# EAGLE board panel (EAGLE 6.3)
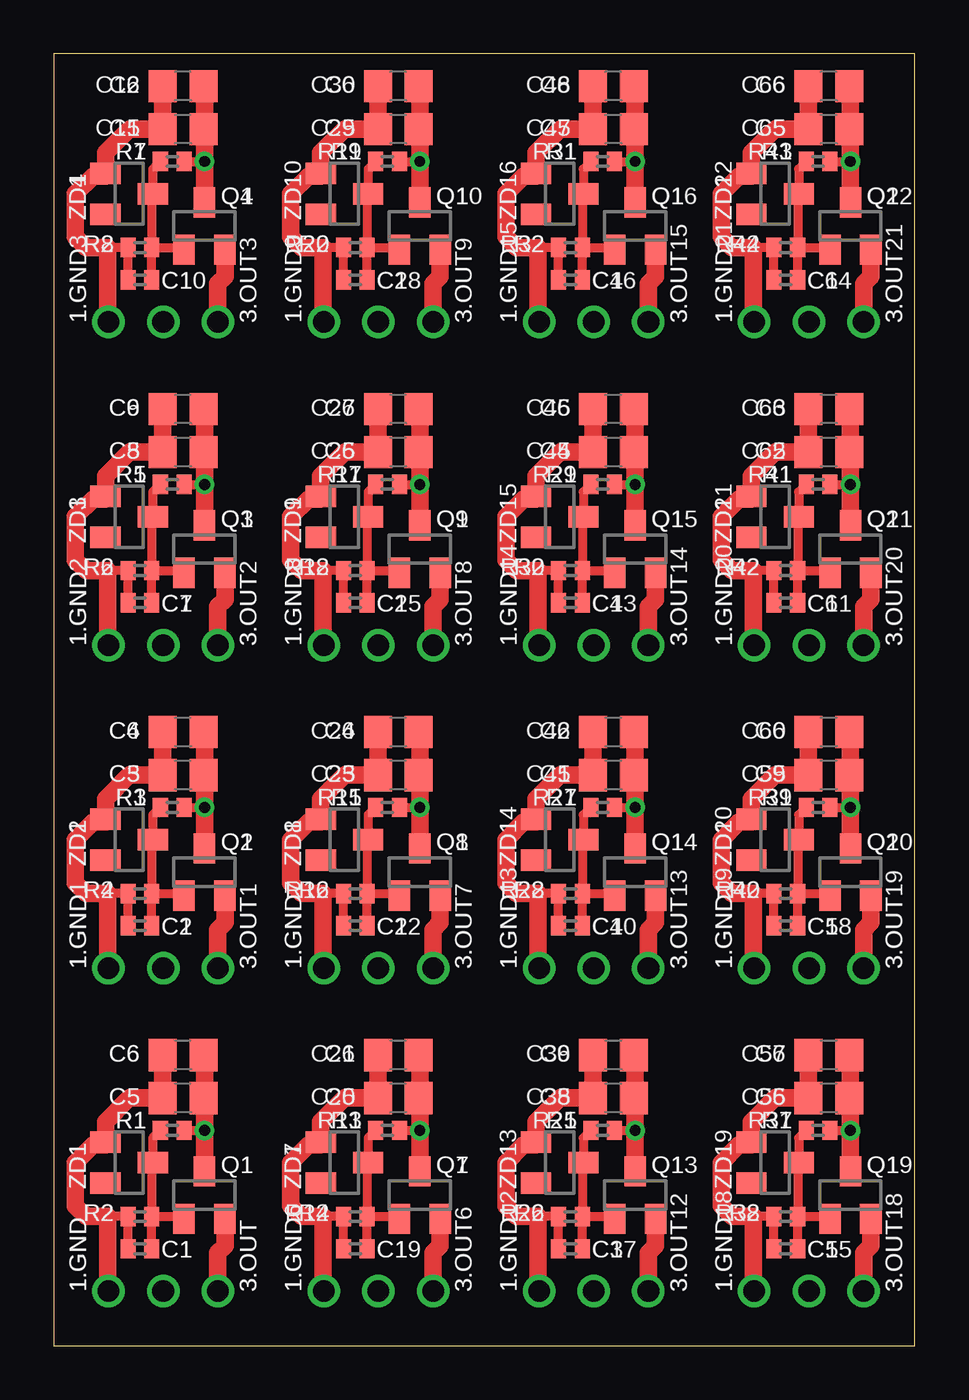
[diagram p0: board, top side]
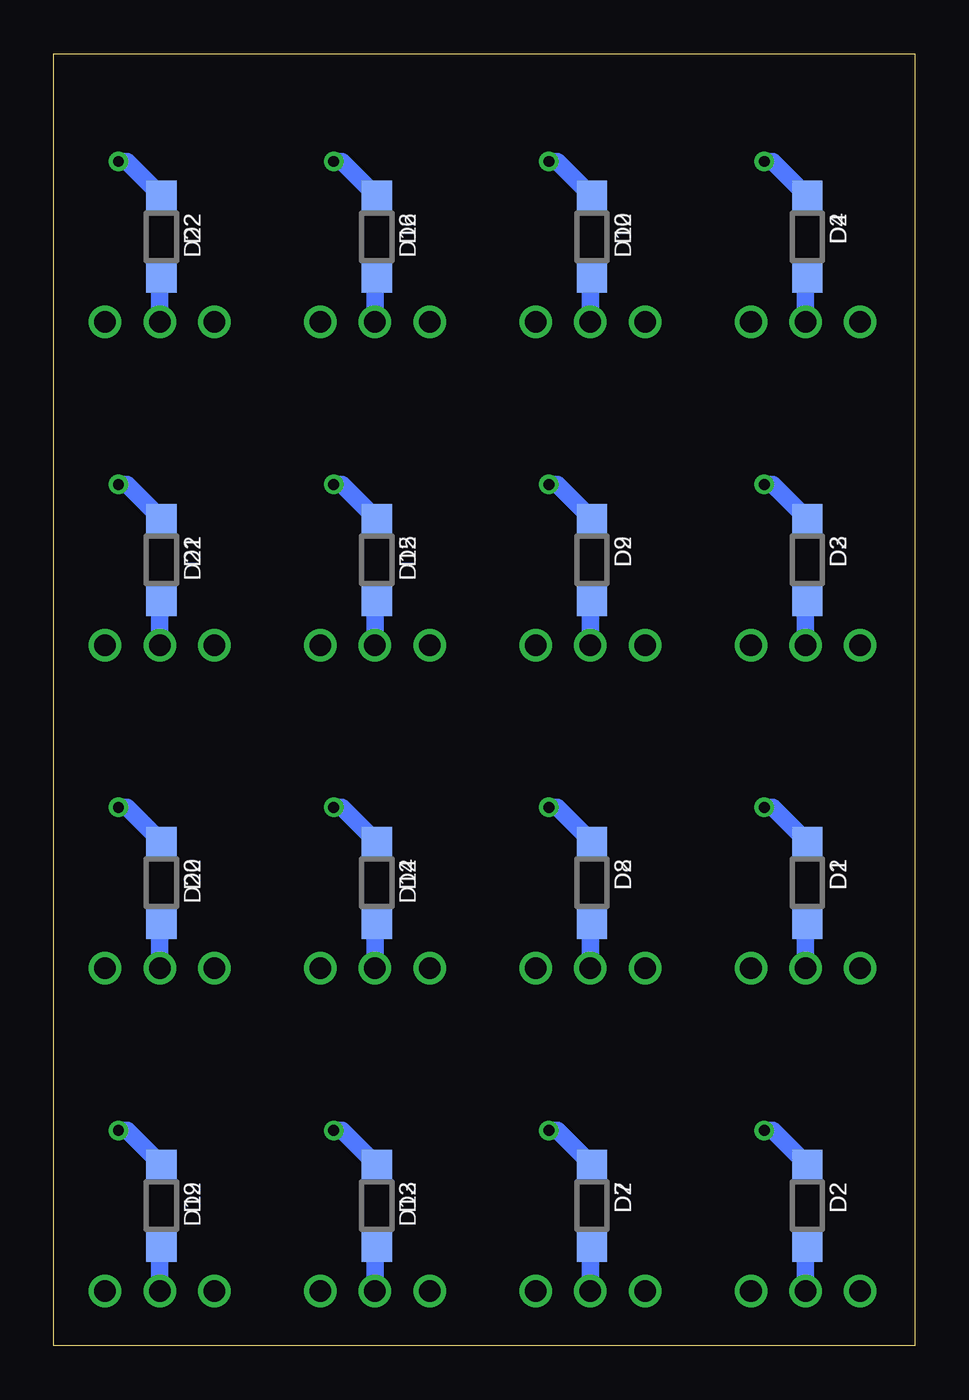
[diagram p1: board, bottom side, seen from below]

Size 40 x 60 mm. Coordinates in mm from the lower left corner, seen from the top.
Outline: 0,0 40,0 40,60 0,60 0,0
Copper layers (1*16): Top 0.035mm / dielectric 1.5mm / Bottom 0.035mm
Design rules "default": minimum track width 10mil, minimum drill 24mil, track to track 8mil, track to pad 8mil, pad to pad 8mil, via to via 8mil, smd to smd 8mil, copper to edge 40mil, drill to drill 8mil, minimum pad ring 10mil, minimum via ring 8mil, stop-mask expansion 4mil, vias tented up to drill 0mil, thermal gap 10mil

## Footprints (pad centres in the part's own frame; a part is rotated, then mirrored left to right if it is on the bottom)
PINS_1_TESTPOINT_KE5000_NOTEXT = drill 1: 1 0,0
C0402 = smd 0.7 x 0.9: 1 -0.55,0; 2 0.55,0
C0805 = smd 1.3 x 1.5: 1 -0.95,0; 2 0.95,0
SOD123 = smd 1.4 x 1.4: A 1.9,0; C -1.9,0
SOT23 = smd 1 x 1.4: 1 -0.95,-1.1; 2 0.95,-1.1; 3 0,1.1
R0402 = smd 0.7 x 0.9: 1 -0.55,0; 2 0.55,0

## Placement (x,y rotation side)
1.GND  TESTPOINTKE5000-SMTEXT  [PINS_1_TESTPOINT_KE5000_NOTEXT]  2.54,2.54 90 top
1.GND1  TESTPOINTKE5000-SMTEXT  [PINS_1_TESTPOINT_KE5000_NOTEXT]  2.54,17.54 90 top
1.GND2  TESTPOINTKE5000-SMTEXT  [PINS_1_TESTPOINT_KE5000_NOTEXT]  2.54,32.54 90 top
1.GND3  TESTPOINTKE5000-SMTEXT  [PINS_1_TESTPOINT_KE5000_NOTEXT]  2.54,47.54 90 top
1.GND6  TESTPOINTKE5000-SMTEXT  [PINS_1_TESTPOINT_KE5000_NOTEXT]  12.54,2.54 90 top
1.GND7  TESTPOINTKE5000-SMTEXT  [PINS_1_TESTPOINT_KE5000_NOTEXT]  12.54,17.54 90 top
1.GND8  TESTPOINTKE5000-SMTEXT  [PINS_1_TESTPOINT_KE5000_NOTEXT]  12.54,32.54 90 top
1.GND9  TESTPOINTKE5000-SMTEXT  [PINS_1_TESTPOINT_KE5000_NOTEXT]  12.54,47.54 90 top
1.GND12  TESTPOINTKE5000-SMTEXT  [PINS_1_TESTPOINT_KE5000_NOTEXT]  22.54,2.54 90 top
1.GND13  TESTPOINTKE5000-SMTEXT  [PINS_1_TESTPOINT_KE5000_NOTEXT]  22.54,17.54 90 top
1.GND14  TESTPOINTKE5000-SMTEXT  [PINS_1_TESTPOINT_KE5000_NOTEXT]  22.54,32.54 90 top
1.GND15  TESTPOINTKE5000-SMTEXT  [PINS_1_TESTPOINT_KE5000_NOTEXT]  22.54,47.54 90 top
1.GND18  TESTPOINTKE5000-SMTEXT  [PINS_1_TESTPOINT_KE5000_NOTEXT]  32.54,2.54 90 top
1.GND19  TESTPOINTKE5000-SMTEXT  [PINS_1_TESTPOINT_KE5000_NOTEXT]  32.54,17.54 90 top
1.GND20  TESTPOINTKE5000-SMTEXT  [PINS_1_TESTPOINT_KE5000_NOTEXT]  32.54,32.54 90 top
1.GND21  TESTPOINTKE5000-SMTEXT  [PINS_1_TESTPOINT_KE5000_NOTEXT]  32.54,47.54 90 top
2.PWR  TESTPOINTKE5000-SMTEXT  [PINS_1_TESTPOINT_KE5000_NOTEXT]  5.08,2.54 180 top
2.PWR1  TESTPOINTKE5000-SMTEXT  [PINS_1_TESTPOINT_KE5000_NOTEXT]  5.08,17.54 180 top
2.PWR2  TESTPOINTKE5000-SMTEXT  [PINS_1_TESTPOINT_KE5000_NOTEXT]  5.08,32.54 180 top
2.PWR3  TESTPOINTKE5000-SMTEXT  [PINS_1_TESTPOINT_KE5000_NOTEXT]  5.08,47.54 180 top
2.PWR6  TESTPOINTKE5000-SMTEXT  [PINS_1_TESTPOINT_KE5000_NOTEXT]  15.08,2.54 180 top
2.PWR7  TESTPOINTKE5000-SMTEXT  [PINS_1_TESTPOINT_KE5000_NOTEXT]  15.08,17.54 180 top
2.PWR8  TESTPOINTKE5000-SMTEXT  [PINS_1_TESTPOINT_KE5000_NOTEXT]  15.08,32.54 180 top
2.PWR9  TESTPOINTKE5000-SMTEXT  [PINS_1_TESTPOINT_KE5000_NOTEXT]  15.08,47.54 180 top
2.PWR12  TESTPOINTKE5000-SMTEXT  [PINS_1_TESTPOINT_KE5000_NOTEXT]  25.08,2.54 180 top
2.PWR13  TESTPOINTKE5000-SMTEXT  [PINS_1_TESTPOINT_KE5000_NOTEXT]  25.08,17.54 180 top
2.PWR14  TESTPOINTKE5000-SMTEXT  [PINS_1_TESTPOINT_KE5000_NOTEXT]  25.08,32.54 180 top
2.PWR15  TESTPOINTKE5000-SMTEXT  [PINS_1_TESTPOINT_KE5000_NOTEXT]  25.08,47.54 180 top
2.PWR18  TESTPOINTKE5000-SMTEXT  [PINS_1_TESTPOINT_KE5000_NOTEXT]  35.08,2.54 180 top
2.PWR19  TESTPOINTKE5000-SMTEXT  [PINS_1_TESTPOINT_KE5000_NOTEXT]  35.08,17.54 180 top
2.PWR20  TESTPOINTKE5000-SMTEXT  [PINS_1_TESTPOINT_KE5000_NOTEXT]  35.08,32.54 180 top
2.PWR21  TESTPOINTKE5000-SMTEXT  [PINS_1_TESTPOINT_KE5000_NOTEXT]  35.08,47.54 180 top
3.OUT  TESTPOINTKE5000-SMTEXT  [PINS_1_TESTPOINT_KE5000_NOTEXT]  7.62,2.54 270 top
3.OUT1  TESTPOINTKE5000-SMTEXT  [PINS_1_TESTPOINT_KE5000_NOTEXT]  7.62,17.54 270 top
3.OUT2  TESTPOINTKE5000-SMTEXT  [PINS_1_TESTPOINT_KE5000_NOTEXT]  7.62,32.54 270 top
3.OUT3  TESTPOINTKE5000-SMTEXT  [PINS_1_TESTPOINT_KE5000_NOTEXT]  7.62,47.54 270 top
3.OUT6  TESTPOINTKE5000-SMTEXT  [PINS_1_TESTPOINT_KE5000_NOTEXT]  17.62,2.54 270 top
3.OUT7  TESTPOINTKE5000-SMTEXT  [PINS_1_TESTPOINT_KE5000_NOTEXT]  17.62,17.54 270 top
3.OUT8  TESTPOINTKE5000-SMTEXT  [PINS_1_TESTPOINT_KE5000_NOTEXT]  17.62,32.54 270 top
3.OUT9  TESTPOINTKE5000-SMTEXT  [PINS_1_TESTPOINT_KE5000_NOTEXT]  17.62,47.54 270 top
3.OUT12  TESTPOINTKE5000-SMTEXT  [PINS_1_TESTPOINT_KE5000_NOTEXT]  27.62,2.54 270 top
3.OUT13  TESTPOINTKE5000-SMTEXT  [PINS_1_TESTPOINT_KE5000_NOTEXT]  27.62,17.54 270 top
3.OUT14  TESTPOINTKE5000-SMTEXT  [PINS_1_TESTPOINT_KE5000_NOTEXT]  27.62,32.54 270 top
3.OUT15  TESTPOINTKE5000-SMTEXT  [PINS_1_TESTPOINT_KE5000_NOTEXT]  27.62,47.54 270 top
3.OUT18  TESTPOINTKE5000-SMTEXT  [PINS_1_TESTPOINT_KE5000_NOTEXT]  37.62,2.54 270 top
3.OUT19  TESTPOINTKE5000-SMTEXT  [PINS_1_TESTPOINT_KE5000_NOTEXT]  37.62,17.54 270 top
3.OUT20  TESTPOINTKE5000-SMTEXT  [PINS_1_TESTPOINT_KE5000_NOTEXT]  37.62,32.54 270 top
3.OUT21  TESTPOINTKE5000-SMTEXT  [PINS_1_TESTPOINT_KE5000_NOTEXT]  37.62,47.54 270 top
C1  1u  [C0402]  4,4.5 180 top
C2  1u  [C0402]  4,19.5 180 top
C3  4u7 50V  [C0805]  6,26.5 180 top
C4  4u7 50V  [C0805]  6,28.5 180 top
C5  4u7 50V  [C0805]  6,11.5 180 top
C6  4u7 50V  [C0805]  6,13.5 180 top
C7  1u  [C0402]  4,34.5 180 top
C8  4u7 50V  [C0805]  6,41.5 180 top
C9  4u7 50V  [C0805]  6,43.5 180 top
C10  1u  [C0402]  4,49.5 180 top
C11  4u7 50V  [C0805]  6,56.5 180 top
C12  4u7 50V  [C0805]  6,58.5 180 top
C19  1u  [C0402]  14,4.5 180 top
C20  4u7 50V  [C0805]  16,11.5 180 top
C21  4u7 50V  [C0805]  16,13.5 180 top
C22  1u  [C0402]  14,19.5 180 top
C23  4u7 50V  [C0805]  16,26.5 180 top
C24  4u7 50V  [C0805]  16,28.5 180 top
C25  1u  [C0402]  14,34.5 180 top
C26  4u7 50V  [C0805]  16,41.5 180 top
C27  4u7 50V  [C0805]  16,43.5 180 top
C28  1u  [C0402]  14,49.5 180 top
C29  4u7 50V  [C0805]  16,56.5 180 top
C30  4u7 50V  [C0805]  16,58.5 180 top
C37  1u  [C0402]  24,4.5 180 top
C38  4u7 50V  [C0805]  26,11.5 180 top
C39  4u7 50V  [C0805]  26,13.5 180 top
C40  1u  [C0402]  24,19.5 180 top
C41  4u7 50V  [C0805]  26,26.5 180 top
C42  4u7 50V  [C0805]  26,28.5 180 top
C43  1u  [C0402]  24,34.5 180 top
C44  4u7 50V  [C0805]  26,41.5 180 top
C45  4u7 50V  [C0805]  26,43.5 180 top
C46  1u  [C0402]  24,49.5 180 top
C47  4u7 50V  [C0805]  26,56.5 180 top
C48  4u7 50V  [C0805]  26,58.5 180 top
C55  1u  [C0402]  34,4.5 180 top
C56  4u7 50V  [C0805]  36,11.5 180 top
C57  4u7 50V  [C0805]  36,13.5 180 top
C58  1u  [C0402]  34,19.5 180 top
C59  4u7 50V  [C0805]  36,26.5 180 top
C60  4u7 50V  [C0805]  36,28.5 180 top
C61  1u  [C0402]  34,34.5 180 top
C62  4u7 50V  [C0805]  36,41.5 180 top
C63  4u7 50V  [C0805]  36,43.5 180 top
C64  1u  [C0402]  34,49.5 180 top
C65  4u7 50V  [C0805]  36,56.5 180 top
C66  4u7 50V  [C0805]  36,58.5 180 top
D1  SM4001PL  [SOD123]  5,21.5 270 bottom
D2  SM4001PL  [SOD123]  5,6.5 270 bottom
D3  SM4001PL  [SOD123]  5,36.5 270 bottom
D4  SM4001PL  [SOD123]  5,51.5 270 bottom
D7  SM4001PL  [SOD123]  15,6.5 270 bottom
D8  SM4001PL  [SOD123]  15,21.5 270 bottom
D9  SM4001PL  [SOD123]  15,36.5 270 bottom
D10  SM4001PL  [SOD123]  15,51.5 270 bottom
D13  SM4001PL  [SOD123]  25,6.5 270 bottom
D14  SM4001PL  [SOD123]  25,21.5 270 bottom
D15  SM4001PL  [SOD123]  25,36.5 270 bottom
D16  SM4001PL  [SOD123]  25,51.5 270 bottom
D19  SM4001PL  [SOD123]  35,6.5 270 bottom
D20  SM4001PL  [SOD123]  35,21.5 270 bottom
D21  SM4001PL  [SOD123]  35,36.5 270 bottom
D22  SM4001PL  [SOD123]  35,51.5 270 bottom
Q1  RYC002N05T316  [SOT23]  7,7 0 top
Q2  RYC002N05T316  [SOT23]  7,22 0 top
Q3  RYC002N05T316  [SOT23]  7,37 0 top
Q4  RYC002N05T316  [SOT23]  7,52 0 top
Q7  RYC002N05T316  [SOT23]  17,7 0 top
Q8  RYC002N05T316  [SOT23]  17,22 0 top
Q9  RYC002N05T316  [SOT23]  17,37 0 top
Q10  RYC002N05T316  [SOT23]  17,52 0 top
Q13  RYC002N05T316  [SOT23]  27,7 0 top
Q14  RYC002N05T316  [SOT23]  27,22 0 top
Q15  RYC002N05T316  [SOT23]  27,37 0 top
Q16  RYC002N05T316  [SOT23]  27,52 0 top
Q19  RYC002N05T316  [SOT23]  37,7 0 top
Q20  RYC002N05T316  [SOT23]  37,22 0 top
Q21  RYC002N05T316  [SOT23]  37,37 0 top
Q22  RYC002N05T316  [SOT23]  37,52 0 top
R1  10k  [R0402]  5.5,10 0 top
R2  499k  [R0402]  4,6 0 top
R3  10k  [R0402]  5.5,25 0 top
R4  499k  [R0402]  4,21 0 top
R5  10k  [R0402]  5.5,40 0 top
R6  499k  [R0402]  4,36 0 top
R7  10k  [R0402]  5.5,55 0 top
R8  499k  [R0402]  4,51 0 top
R13  10k  [R0402]  15.5,10 0 top
R14  499k  [R0402]  14,6 0 top
R15  10k  [R0402]  15.5,25 0 top
R16  499k  [R0402]  14,21 0 top
R17  10k  [R0402]  15.5,40 0 top
R18  499k  [R0402]  14,36 0 top
R19  10k  [R0402]  15.5,55 0 top
R20  499k  [R0402]  14,51 0 top
R25  10k  [R0402]  25.5,10 0 top
R26  499k  [R0402]  24,6 0 top
R27  10k  [R0402]  25.5,25 0 top
R28  499k  [R0402]  24,21 0 top
R29  10k  [R0402]  25.5,40 0 top
R30  499k  [R0402]  24,36 0 top
R31  10k  [R0402]  25.5,55 0 top
R32  499k  [R0402]  24,51 0 top
R37  10k  [R0402]  35.5,10 0 top
R38  499k  [R0402]  34,6 0 top
R39  10k  [R0402]  35.5,25 0 top
R40  499k  [R0402]  34,21 0 top
R41  10k  [R0402]  35.5,40 0 top
R42  499k  [R0402]  34,36 0 top
R43  10k  [R0402]  35.5,55 0 top
R44  499k  [R0402]  34,51 0 top
ZD1  15V  [SOT23]  3.5,8.5 270 top
ZD2  15V  [SOT23]  3.5,23.5 270 top
ZD3  15V  [SOT23]  3.5,38.5 270 top
ZD4  15V  [SOT23]  3.5,53.5 270 top
ZD7  15V  [SOT23]  13.5,8.5 270 top
ZD8  15V  [SOT23]  13.5,23.5 270 top
ZD9  15V  [SOT23]  13.5,38.5 270 top
ZD10  15V  [SOT23]  13.5,53.5 270 top
ZD13  15V  [SOT23]  23.5,8.5 270 top
ZD14  15V  [SOT23]  23.5,23.5 270 top
ZD15  15V  [SOT23]  23.5,38.5 270 top
ZD16  15V  [SOT23]  23.5,53.5 270 top
ZD19  15V  [SOT23]  33.5,8.5 270 top
ZD20  15V  [SOT23]  33.5,23.5 270 top
ZD21  15V  [SOT23]  33.5,38.5 270 top
ZD22  15V  [SOT23]  33.5,53.5 270 top

## Library data of the parts
1.GND 1.GND1-1.GND3 1.GND6-1.GND9 1.GND12-1.GND15 1.GND18-1.GND21 2.PWR 2.PWR1-2.PWR3 2.PWR6-2.PWR9 2.PWR12-2.PWR15 2.PWR18-2.PWR21 3.OUT 3.OUT1-3.OUT3 3.OUT6-3.OUT9 3.OUT12-3.OUT15 3.OUT18-3.OUT21 C1-C12 C19-C30 C37-C48 C55-C66 D1-D4 D7-D10 D13-D16 D19-D22 Q1-Q4 Q7-Q10 Q13-Q16 Q19-Q22 R1-R8 R13-R20 R25-R32 R37-R44 ZD1-ZD4 ZD7-ZD10 ZD13-ZD16 ZD19-ZD22 = nolan

## Nets
B+: 2.PWR.1 D2.A
B+1: 2.PWR1.1 D1.A
B+2: 2.PWR2.1 D3.A
B+3: 2.PWR3.1 D4.A
B+6: 2.PWR6.1 D7.A
B+7: 2.PWR7.1 D8.A
B+8: 2.PWR8.1 D9.A
B+9: 2.PWR9.1 D10.A
B+12: 2.PWR12.1 D13.A
B+13: 2.PWR13.1 D14.A
B+14: 2.PWR14.1 D15.A
B+15: 2.PWR15.1 D16.A
B+18: 2.PWR18.1 D19.A
B+19: 2.PWR19.1 D20.A
B+20: 2.PWR20.1 D21.A
B+21: 2.PWR21.1 D22.A
GND: 1.GND.1 C1.2 C5.2 C6.2 R2.1 ZD1.1
GND1: 1.GND1.1 C2.2 C3.2 C4.2 R4.1 ZD2.1
GND2: 1.GND2.1 C7.2 C8.2 C9.2 R6.1 ZD3.1
GND3: 1.GND3.1 C10.2 C11.2 C12.2 R8.1 ZD4.1
GND6: 1.GND6.1 C19.2 C20.2 C21.2 R14.1 ZD7.1
GND7: 1.GND7.1 C22.2 C23.2 C24.2 R16.1 ZD8.1
GND8: 1.GND8.1 C25.2 C26.2 C27.2 R18.1 ZD9.1
GND9: 1.GND9.1 C28.2 C29.2 C30.2 R20.1 ZD10.1
GND12: 1.GND12.1 C37.2 C38.2 C39.2 R26.1 ZD13.1
GND13: 1.GND13.1 C40.2 C41.2 C42.2 R28.1 ZD14.1
GND14: 1.GND14.1 C43.2 C44.2 C45.2 R30.1 ZD15.1
GND15: 1.GND15.1 C46.2 C47.2 C48.2 R32.1 ZD16.1
GND18: 1.GND18.1 C55.2 C56.2 C57.2 R38.1 ZD19.1
GND19: 1.GND19.1 C58.2 C59.2 C60.2 R40.1 ZD20.1
GND20: 1.GND20.1 C61.2 C62.2 C63.2 R42.1 ZD21.1
GND21: 1.GND21.1 C64.2 C65.2 C66.2 R44.1 ZD22.1
Q1.DRAIN: C5.1 C6.1 D2.C Q1.3 R1.2
Q1.DRAIN1: C3.1 C4.1 D1.C Q2.3 R3.2
Q1.DRAIN2: C8.1 C9.1 D3.C Q3.3 R5.2
Q1.DRAIN3: C11.1 C12.1 D4.C Q4.3 R7.2
Q1.DRAIN6: C20.1 C21.1 D7.C Q7.3 R13.2
Q1.DRAIN7: C23.1 C24.1 D8.C Q8.3 R15.2
Q1.DRAIN8: C26.1 C27.1 D9.C Q9.3 R17.2
Q1.DRAIN9: C29.1 C30.1 D10.C Q10.3 R19.2
Q1.DRAIN12: C38.1 C39.1 D13.C Q13.3 R25.2
Q1.DRAIN13: C41.1 C42.1 D14.C Q14.3 R27.2
Q1.DRAIN14: C44.1 C45.1 D15.C Q15.3 R29.2
Q1.DRAIN15: C47.1 C48.1 D16.C Q16.3 R31.2
Q1.DRAIN18: C56.1 C57.1 D19.C Q19.3 R37.2
Q1.DRAIN19: C59.1 C60.1 D20.C Q20.3 R39.2
Q1.DRAIN20: C62.1 C63.1 D21.C Q21.3 R41.2
Q1.DRAIN21: C65.1 C66.1 D22.C Q22.3 R43.2
Q1.GATE: C1.1 Q1.1 R1.1 R2.2 ZD1.3
Q1.GATE1: C2.1 Q2.1 R3.1 R4.2 ZD2.3
Q1.GATE2: C7.1 Q3.1 R5.1 R6.2 ZD3.3
Q1.GATE3: C10.1 Q4.1 R7.1 R8.2 ZD4.3
Q1.GATE6: C19.1 Q7.1 R13.1 R14.2 ZD7.3
Q1.GATE7: C22.1 Q8.1 R15.1 R16.2 ZD8.3
Q1.GATE8: C25.1 Q9.1 R17.1 R18.2 ZD9.3
Q1.GATE9: C28.1 Q10.1 R19.1 R20.2 ZD10.3
Q1.GATE12: C37.1 Q13.1 R25.1 R26.2 ZD13.3
Q1.GATE13: C40.1 Q14.1 R27.1 R28.2 ZD14.3
Q1.GATE14: C43.1 Q15.1 R29.1 R30.2 ZD15.3
Q1.GATE15: C46.1 Q16.1 R31.1 R32.2 ZD16.3
Q1.GATE18: C55.1 Q19.1 R37.1 R38.2 ZD19.3
Q1.GATE19: C58.1 Q20.1 R39.1 R40.2 ZD20.3
Q1.GATE20: C61.1 Q21.1 R41.1 R42.2 ZD21.3
Q1.GATE21: C64.1 Q22.1 R43.1 R44.2 ZD22.3
VM: 3.OUT.1 Q1.2
VM1: 3.OUT1.1 Q2.2
VM2: 3.OUT2.1 Q3.2
VM3: 3.OUT3.1 Q4.2
VM6: 3.OUT6.1 Q7.2
VM7: 3.OUT7.1 Q8.2
VM8: 3.OUT8.1 Q9.2
VM9: 3.OUT9.1 Q10.2
VM12: 3.OUT12.1 Q13.2
VM13: 3.OUT13.1 Q14.2
VM14: 3.OUT14.1 Q15.2
VM15: 3.OUT15.1 Q16.2
VM18: 3.OUT18.1 Q19.2
VM19: 3.OUT19.1 Q20.2
VM20: 3.OUT20.1 Q21.2
VM21: 3.OUT21.1 Q22.2

## Tracks (layer width: path | path; a pad name or v marks a point on that pad's centre or on a via)
B+
  Bottom 0.406: D2.A 5.08,4.52
  Bottom 0.813: 5.08,4.52 2.PWR.1
B+1
  Bottom 0.406: D1.A 5.08,19.52
  Bottom 0.813: 5.08,19.52 2.PWR1.1
B+2
  Bottom 0.406: D3.A 5.08,34.52
  Bottom 0.813: 5.08,34.52 2.PWR2.1
B+3
  Bottom 0.406: D4.A 5.08,49.52
  Bottom 0.813: 5.08,49.52 2.PWR3.1
B+6
  Bottom 0.406: D7.A 15.08,4.52
  Bottom 0.813: 15.08,4.52 2.PWR6.1
B+7
  Bottom 0.406: D8.A 15.08,19.52
  Bottom 0.813: 15.08,19.52 2.PWR7.1
B+8
  Bottom 0.406: D9.A 15.08,34.52
  Bottom 0.813: 15.08,34.52 2.PWR8.1
B+9
  Bottom 0.406: D10.A 15.08,49.52
  Bottom 0.813: 15.08,49.52 2.PWR9.1
B+12
  Bottom 0.406: D13.A 25.08,4.52
  Bottom 0.813: 25.08,4.52 2.PWR12.1
B+13
  Bottom 0.406: D14.A 25.08,19.52
  Bottom 0.813: 25.08,19.52 2.PWR13.1
B+14
  Bottom 0.406: D15.A 25.08,34.52
  Bottom 0.813: 25.08,34.52 2.PWR14.1
B+15
  Bottom 0.406: D16.A 25.08,49.52
  Bottom 0.813: 25.08,49.52 2.PWR15.1
B+18
  Bottom 0.406: D19.A 35.08,4.52
  Bottom 0.813: 35.08,4.52 2.PWR18.1
B+19
  Bottom 0.406: D20.A 35.08,19.52
  Bottom 0.813: 35.08,19.52 2.PWR19.1
B+20
  Bottom 0.406: D21.A 35.08,34.52
  Bottom 0.813: 35.08,34.52 2.PWR20.1
B+21
  Bottom 0.406: D22.A 35.08,49.52
  Bottom 0.813: 35.08,49.52 2.PWR21.1
GND
  Top 0.406: 2.4,9.32 ZD1.1 | 2.5,6 R2.1 C1.2
  Top 0.813: C6.2 C5.2 3.5,11.5 2.4,10.4 ZD1.1 | 1.GND.1 2.5,2.58 2.5,6 1.5,6 1,6.5 1,8.5 1.82,9.32 2.4,9.32
GND1
  Top 0.406: 2.4,24.32 ZD2.1 | 2.5,21 R4.1 C2.2
  Top 0.813: C4.2 C3.2 3.5,26.5 2.4,25.4 ZD2.1 | 1.GND1.1 2.5,17.58 2.5,21 1.5,21 1,21.5 1,23.5 1.82,24.32 2.4,24.32
GND2
  Top 0.406: 2.4,39.33 ZD3.1 | 2.5,36 R6.1 C7.2
  Top 0.813: C9.2 C8.2 3.5,41.5 2.4,40.4 ZD3.1 | 1.GND2.1 2.5,32.58 2.5,36 1.5,36 1,36.5 1,38.5 1.82,39.33 2.4,39.33
GND3
  Top 0.406: 2.4,54.33 ZD4.1 | 2.5,51 R8.1 C10.2
  Top 0.813: C12.2 C11.2 3.5,56.5 2.4,55.4 ZD4.1 | 1.GND3.1 2.5,47.58 2.5,51 1.5,51 1,51.5 1,53.5 1.82,54.33 2.4,54.33
GND6
  Top 0.406: 12.4,9.32 ZD7.1 | 12.5,6 R14.1 C19.2
  Top 0.813: C21.2 C20.2 13.5,11.5 12.4,10.4 ZD7.1 | 1.GND6.1 12.5,2.58 12.5,6 11.5,6 11,6.5 11,8.5 11.82,9.32 12.4,9.32
GND7
  Top 0.406: 12.4,24.32 ZD8.1 | 12.5,21 R16.1 C22.2
  Top 0.813: C24.2 C23.2 13.5,26.5 12.4,25.4 ZD8.1 | 1.GND7.1 12.5,17.58 12.5,21 11.5,21 11,21.5 11,23.5 11.82,24.32 12.4,24.32
GND8
  Top 0.406: 12.4,39.33 ZD9.1 | 12.5,36 R18.1 C25.2
  Top 0.813: C27.2 C26.2 13.5,41.5 12.4,40.4 ZD9.1 | 1.GND8.1 12.5,32.58 12.5,36 11.5,36 11,36.5 11,38.5 11.82,39.33 12.4,39.33
GND9
  Top 0.406: 12.4,54.33 ZD10.1 | 12.5,51 R20.1 C28.2
  Top 0.813: C30.2 C29.2 13.5,56.5 12.4,55.4 ZD10.1 | 1.GND9.1 12.5,47.58 12.5,51 11.5,51 11,51.5 11,53.5 11.82,54.33 12.4,54.33
GND12
  Top 0.406: 22.4,9.32 ZD13.1 | 22.5,6 R26.1 C37.2
  Top 0.813: C39.2 C38.2 23.5,11.5 22.4,10.4 ZD13.1 | 1.GND12.1 22.5,2.58 22.5,6 21.5,6 21,6.5 21,8.5 21.82,9.32 22.4,9.32
GND13
  Top 0.406: 22.4,24.32 ZD14.1 | 22.5,21 R28.1 C40.2
  Top 0.813: C42.2 C41.2 23.5,26.5 22.4,25.4 ZD14.1 | 1.GND13.1 22.5,17.58 22.5,21 21.5,21 21,21.5 21,23.5 21.82,24.32 22.4,24.32
GND14
  Top 0.406: 22.4,39.33 ZD15.1 | 22.5,36 R30.1 C43.2
  Top 0.813: C45.2 C44.2 23.5,41.5 22.4,40.4 ZD15.1 | 1.GND14.1 22.5,32.58 22.5,36 21.5,36 21,36.5 21,38.5 21.82,39.33 22.4,39.33
GND15
  Top 0.406: 22.4,54.33 ZD16.1 | 22.5,51 R32.1 C46.2
  Top 0.813: C48.2 C47.2 23.5,56.5 22.4,55.4 ZD16.1 | 1.GND15.1 22.5,47.58 22.5,51 21.5,51 21,51.5 21,53.5 21.82,54.33 22.4,54.33
GND18
  Top 0.406: 32.4,9.32 ZD19.1 | 32.5,6 R38.1 C55.2
  Top 0.813: C57.2 C56.2 33.5,11.5 32.4,10.4 ZD19.1 | 1.GND18.1 32.5,2.58 32.5,6 31.5,6 31,6.5 31,8.5 31.82,9.32 32.4,9.32
GND19
  Top 0.406: 32.4,24.32 ZD20.1 | 32.5,21 R40.1 C58.2
  Top 0.813: C60.2 C59.2 33.5,26.5 32.4,25.4 ZD20.1 | 1.GND19.1 32.5,17.58 32.5,21 31.5,21 31,21.5 31,23.5 31.82,24.32 32.4,24.32
GND20
  Top 0.406: 32.4,39.33 ZD21.1 | 32.5,36 R42.1 C61.2
  Top 0.813: C63.2 C62.2 33.5,41.5 32.4,40.4 ZD21.1 | 1.GND20.1 32.5,32.58 32.5,36 31.5,36 31,36.5 31,38.5 31.82,39.33 32.4,39.33
GND21
  Top 0.406: 32.4,54.33 ZD22.1 | 32.5,51 R44.1 C64.2
  Top 0.813: C66.2 C65.2 33.5,56.5 32.4,55.4 ZD22.1 | 1.GND21.1 32.5,47.58 32.5,51 31.5,51 31,51.5 31,53.5 31.82,54.33 32.4,54.33
Q1.DRAIN  (via drill 0.5)
  Top 0.406: R1.2 v7,10
  Top 0.813: Q1.3 v7,10 7,11.45 | 7,11.45 C5.1 | C6.1 7,13.45 7,11.45
  Bottom 0.813: D2.C 6.6,10 v7,10
Q1.DRAIN1  (via drill 0.5)
  Top 0.406: R3.2 v7,25
  Top 0.813: Q2.3 v7,25 7,26.45 | 7,26.45 C3.1 | C4.1 7,28.45 7,26.45
  Bottom 0.813: D1.C 6.6,25 v7,25
Q1.DRAIN2  (via drill 0.5)
  Top 0.406: R5.2 v7,40
  Top 0.813: Q3.3 v7,40 7,41.45 | 7,41.45 C8.1 | C9.1 7,43.45 7,41.45
  Bottom 0.813: D3.C 6.6,40 v7,40
Q1.DRAIN3  (via drill 0.5)
  Top 0.406: R7.2 v7,55
  Top 0.813: Q4.3 v7,55 7,56.45 | 7,56.45 C11.1 | C12.1 7,58.45 7,56.45
  Bottom 0.813: D4.C 6.6,55 v7,55
Q1.DRAIN6  (via drill 0.5)
  Top 0.406: R13.2 v17,10
  Top 0.813: Q7.3 v17,10 17,11.45 | 17,11.45 C20.1 | C21.1 17,13.45 17,11.45
  Bottom 0.813: D7.C 16.6,10 v17,10
Q1.DRAIN7  (via drill 0.5)
  Top 0.406: R15.2 v17,25
  Top 0.813: Q8.3 v17,25 17,26.45 | 17,26.45 C23.1 | C24.1 17,28.45 17,26.45
  Bottom 0.813: D8.C 16.6,25 v17,25
Q1.DRAIN8  (via drill 0.5)
  Top 0.406: R17.2 v17,40
  Top 0.813: Q9.3 v17,40 17,41.45 | 17,41.45 C26.1 | C27.1 17,43.45 17,41.45
  Bottom 0.813: D9.C 16.6,40 v17,40
Q1.DRAIN9  (via drill 0.5)
  Top 0.406: R19.2 v17,55
  Top 0.813: Q10.3 v17,55 17,56.45 | 17,56.45 C29.1 | C30.1 17,58.45 17,56.45
  Bottom 0.813: D10.C 16.6,55 v17,55
Q1.DRAIN12  (via drill 0.5)
  Top 0.406: R25.2 v27,10
  Top 0.813: Q13.3 v27,10 27,11.45 | 27,11.45 C38.1 | C39.1 27,13.45 27,11.45
  Bottom 0.813: D13.C 26.6,10 v27,10
Q1.DRAIN13  (via drill 0.5)
  Top 0.406: R27.2 v27,25
  Top 0.813: Q14.3 v27,25 27,26.45 | 27,26.45 C41.1 | C42.1 27,28.45 27,26.45
  Bottom 0.813: D14.C 26.6,25 v27,25
Q1.DRAIN14  (via drill 0.5)
  Top 0.406: R29.2 v27,40
  Top 0.813: Q15.3 v27,40 27,41.45 | 27,41.45 C44.1 | C45.1 27,43.45 27,41.45
  Bottom 0.813: D15.C 26.6,40 v27,40
Q1.DRAIN15  (via drill 0.5)
  Top 0.406: R31.2 v27,55
  Top 0.813: Q16.3 v27,55 27,56.45 | 27,56.45 C47.1 | C48.1 27,58.45 27,56.45
  Bottom 0.813: D16.C 26.6,55 v27,55
Q1.DRAIN18  (via drill 0.5)
  Top 0.406: R37.2 v37,10
  Top 0.813: Q19.3 v37,10 37,11.45 | 37,11.45 C56.1 | C57.1 37,13.45 37,11.45
  Bottom 0.813: D19.C 36.6,10 v37,10
Q1.DRAIN19  (via drill 0.5)
  Top 0.406: R39.2 v37,25
  Top 0.813: Q20.3 v37,25 37,26.45 | 37,26.45 C59.1 | C60.1 37,28.45 37,26.45
  Bottom 0.813: D20.C 36.6,25 v37,25
Q1.DRAIN20  (via drill 0.5)
  Top 0.406: R41.2 v37,40
  Top 0.813: Q21.3 v37,40 37,41.45 | 37,41.45 C62.1 | C63.1 37,43.45 37,41.45
  Bottom 0.813: D21.C 36.6,40 v37,40
Q1.DRAIN21  (via drill 0.5)
  Top 0.406: R43.2 v37,55
  Top 0.813: Q22.3 v37,55 37,56.45 | 37,56.45 C65.1 | C66.1 37,58.45 37,56.45
  Bottom 0.813: D22.C 36.6,55 v37,55
Q1.GATE
  Top 0.406: R1.1 4.6,9.65 ZD1.3 4.55,8.45 R2.2 | R2.2 5.95,6 Q1.1 | C1.1 R2.2
Q1.GATE1
  Top 0.406: R3.1 4.6,24.65 ZD2.3 4.55,23.45 R4.2 | R4.2 5.95,21 Q2.1 | C2.1 R4.2
Q1.GATE2
  Top 0.406: R5.1 4.6,39.65 ZD3.3 4.55,38.45 R6.2 | R6.2 5.95,36 Q3.1 | C7.1 R6.2
Q1.GATE3
  Top 0.406: R7.1 4.6,54.65 ZD4.3 4.55,53.45 R8.2 | R8.2 5.95,51 Q4.1 | C10.1 R8.2
Q1.GATE6
  Top 0.406: R13.1 14.6,9.65 ZD7.3 14.55,8.45 R14.2 | R14.2 15.95,6 Q7.1 | C19.1 R14.2
Q1.GATE7
  Top 0.406: R15.1 14.6,24.65 ZD8.3 14.55,23.45 R16.2 | R16.2 15.95,21 Q8.1 | C22.1 R16.2
Q1.GATE8
  Top 0.406: R17.1 14.6,39.65 ZD9.3 14.55,38.45 R18.2 | R18.2 15.95,36 Q9.1 | C25.1 R18.2
Q1.GATE9
  Top 0.406: R19.1 14.6,54.65 ZD10.3 14.55,53.45 R20.2 | R20.2 15.95,51 Q10.1 | C28.1 R20.2
Q1.GATE12
  Top 0.406: R25.1 24.6,9.65 ZD13.3 24.55,8.45 R26.2 | R26.2 25.95,6 Q13.1 | C37.1 R26.2
Q1.GATE13
  Top 0.406: R27.1 24.6,24.65 ZD14.3 24.55,23.45 R28.2 | R28.2 25.95,21 Q14.1 | C40.1 R28.2
Q1.GATE14
  Top 0.406: R29.1 24.6,39.65 ZD15.3 24.55,38.45 R30.2 | R30.2 25.95,36 Q15.1 | C43.1 R30.2
Q1.GATE15
  Top 0.406: R31.1 24.6,54.65 ZD16.3 24.55,53.45 R32.2 | R32.2 25.95,51 Q16.1 | C46.1 R32.2
Q1.GATE18
  Top 0.406: R37.1 34.6,9.65 ZD19.3 34.55,8.45 R38.2 | R38.2 35.95,6 Q19.1 | C55.1 R38.2
Q1.GATE19
  Top 0.406: R39.1 34.6,24.65 ZD20.3 34.55,23.45 R40.2 | R40.2 35.95,21 Q20.1 | C58.1 R40.2
Q1.GATE20
  Top 0.406: R41.1 34.6,39.65 ZD21.3 34.55,38.45 R42.2 | R42.2 35.95,36 Q21.1 | C61.1 R42.2
Q1.GATE21
  Top 0.406: R43.1 34.6,54.65 ZD22.3 34.55,53.45 R44.2 | R44.2 35.95,51 Q22.1 | C64.1 R44.2
VM
  Top 0.813: Q1.2 7.95,4.65 7.62,4.32 3.OUT.1
VM1
  Top 0.813: Q2.2 7.95,19.65 7.62,19.32 3.OUT1.1
VM2
  Top 0.813: Q3.2 7.95,34.65 7.62,34.32 3.OUT2.1
VM3
  Top 0.813: Q4.2 7.95,49.65 7.62,49.32 3.OUT3.1
VM6
  Top 0.813: Q7.2 17.95,4.65 17.62,4.32 3.OUT6.1
VM7
  Top 0.813: Q8.2 17.95,19.65 17.62,19.32 3.OUT7.1
VM8
  Top 0.813: Q9.2 17.95,34.65 17.62,34.32 3.OUT8.1
VM9
  Top 0.813: Q10.2 17.95,49.65 17.62,49.32 3.OUT9.1
VM12
  Top 0.813: Q13.2 27.95,4.65 27.62,4.32 3.OUT12.1
VM13
  Top 0.813: Q14.2 27.95,19.65 27.62,19.32 3.OUT13.1
VM14
  Top 0.813: Q15.2 27.95,34.65 27.62,34.32 3.OUT14.1
VM15
  Top 0.813: Q16.2 27.95,49.65 27.62,49.32 3.OUT15.1
VM18
  Top 0.813: Q19.2 37.95,4.65 37.62,4.32 3.OUT18.1
VM19
  Top 0.813: Q20.2 37.95,19.65 37.62,19.32 3.OUT19.1
VM20
  Top 0.813: Q21.2 37.95,34.65 37.62,34.32 3.OUT20.1
VM21
  Top 0.813: Q22.2 37.95,49.65 37.62,49.32 3.OUT21.1

## Text on the board
_tNames: C6 | C6 | C6 | C6 | C5 | C5 | C5 | C5 | R1 | R1 | R1 | R1 | Q1 | Q1 | Q1 | Q1 | ZD1 | ZD1 | ZD1 | ZD1 | R2 | R2 | R2 | R2 | C1 | C1 | C1 | C1 | 1.GND | 3.OUT | 1.GND | 3.OUT | 1.GND | 3.OUT | 1.GND | 3.OUT | C6 | C6 | C6 | C6 | C5 | C5 | C5 | C5 | R1 | R1 | R1 | R1 | Q1 | Q1 | Q1 | Q1 | ZD1 | ZD1 | ZD1 | ZD1 | R2 | R2 | R2 | R2 | C1 | C1 | C1 | C1 | 1.GND | 3.OUT | 1.GND | 3.OUT | 1.GND | 3.OUT | 1.GND | 3.OUT | C6 | C6 | C6 | C6 | C5 | C5 | C5 | C5 | R1 | R1 | R1 | R1 | Q1 | Q1 | Q1 | Q1 | ZD1 | ZD1 | ZD1 | ZD1 | R2 | R2 | R2 | R2 | C1 | C1 | C1 | C1 | 1.GND | 3.OUT | 1.GND | 3.OUT | 1.GND | 3.OUT | 1.GND | 3.OUT | C6 | C6 | C6 | C6 | C5 | C5 | C5 | C5 | R1 | R1 | R1 | R1 | Q1 | Q1 | Q1 | Q1 | ZD1 | ZD1 | ZD1 | ZD1 | R2 | R2 | R2 | R2 | C1 | C1 | C1 | C1 | 1.GND | 3.OUT | 1.GND | 3.OUT | 1.GND | 3.OUT | 1.GND | 3.OUT
_bNames: D2 | D2 | D2 | D2 | D2 | D2 | D2 | D2 | D2 | D2 | D2 | D2 | D2 | D2 | D2 | D2